# Altium PCB PCB.PcbDoc
Units mm, origin at the board's own origin, x right, y up, seen from the top; angles counter-clockwise.
Board outline 144.78 x 104.14 mm, 2 copper layers (Top Layer, Bottom Layer); 7 components, 21 nets, 18 pads, 0 vias.
Unrouted connection lines stored in the file: 9.
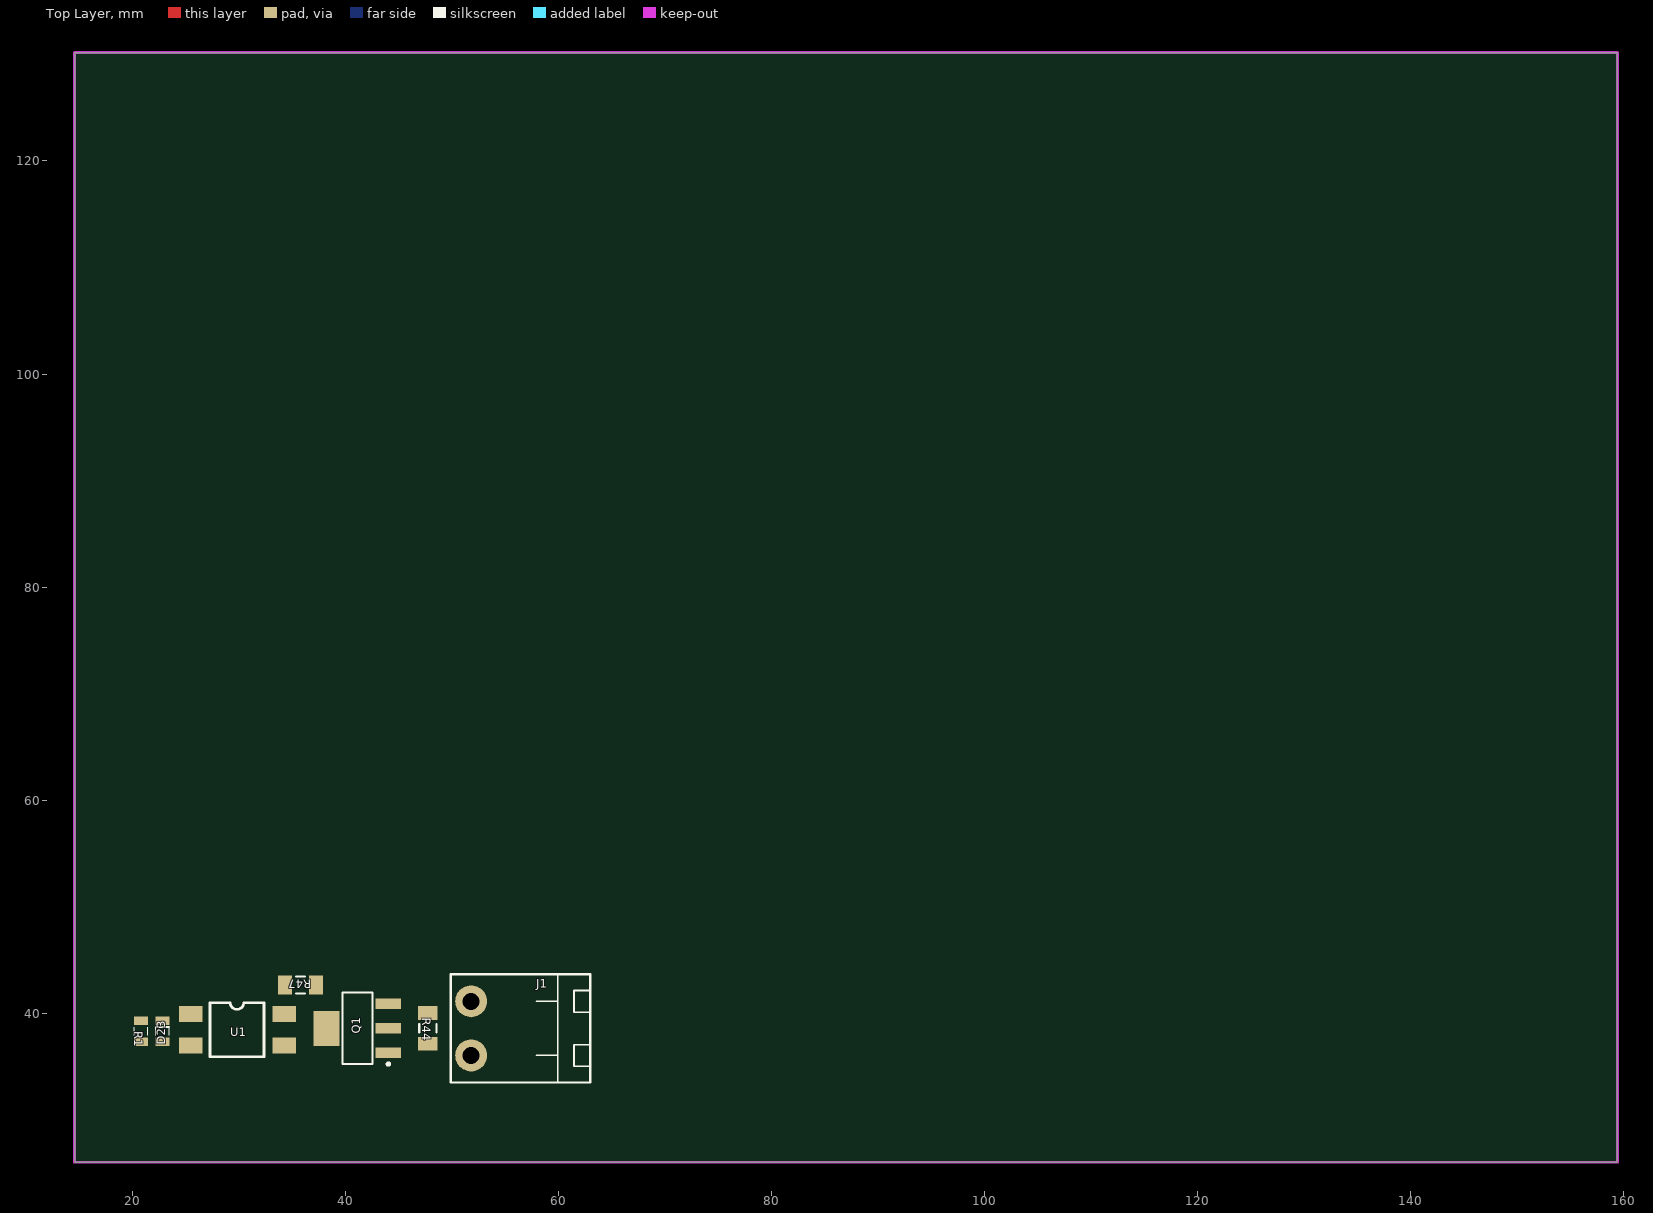
[diagram p0: Top Layer view]
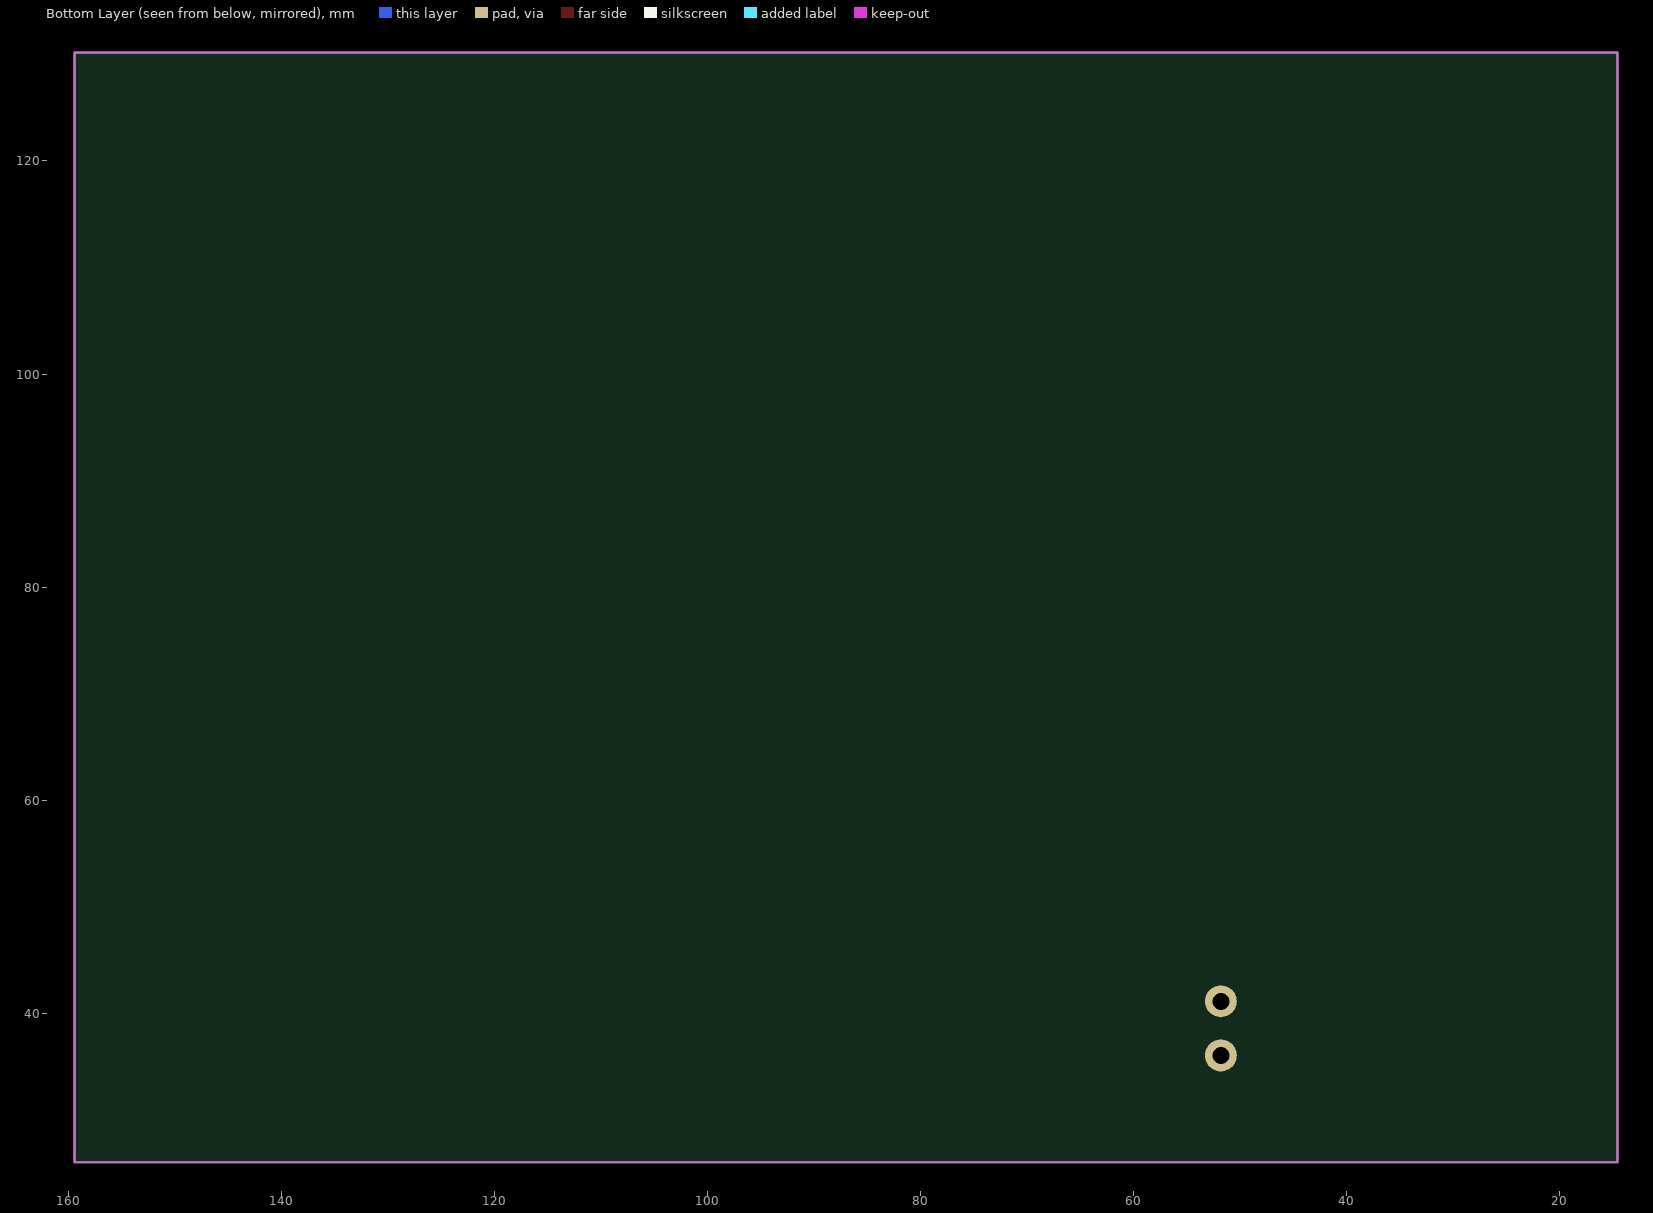
[diagram p1: Bottom Layer view, seen from below]

## Layer stack, top to bottom
Top Solder: solder mask 0.0102, Solder Resist, Dk 3.5
Top Layer: signal copper 0.0356
Dielectric 1: dielectric 0.32, FR-4, Dk 4.8
Bottom Layer: signal copper 0.0356
Bottom Solder: solder mask 0.0102, Solder Resist, Dk 3.5

## Board outline
14.605,26.035 159.385,26.035 159.385,130.175 14.605,130.175

## Design rules (kind name [scope] priority, off if disabled: settings)
Clearance [All] p1: gap=0.3
ComponentClearance [All] p1 off: gap=0 collisioncheckmode=3 verticalgap=0 showdistances=FALSE
Height [All] p1: minheight=0 maxheight=50 prefheight=12.7
PolygonConnect [All] p1: connectstyle=Relief reliefconductorwidth=0.254 reliefentries=4 polygonreliefangle="90 Angle" airgapwidth=0.254
RoutingVias [All] p1: holewidth=0.711 width=1.27 viastyle="Through Hole" minholewidth=0.711 minwidth=1.27 maxholewidth=0.711 maxwidth=1.27
SolderMaskExpansion [All] p1: expansion=0.102
Width [All] p1: maxlimit=0.5 minlimit=0.5 preferedwidth=0.5
28 further rules are at their usual default settings.

## Components (designator, comment, footprint, x,y, rotation, side; value= is the part's Value field where it differs from the comment)
D23 "YELLOW" 0805_Diode 22.86,38.354 r90 top
J1 "2Pin" Fonics_2PIN_1 51.816,38.608 r90 top
Q1 "BCP56" SOT223-4N 41.148,38.608 r180 top
R1 "330" 0805 20.828,38.354 r270 top
R44 "470" RESC3216N 47.752,38.608 r270 top
R47 "47" RESC3216N 35.814,42.672 r180 top
U1 "TLP521" SMD_4PIN 29.845,38.481 r0 top

## Footprints (in the part's own frame and the unit in brackets; to place one, negate y for a bottom-side part, rotate by r counter-clockwise, add the part's x,y. Pads: shape width x height; smd on the part's side, far side on the other; paste and mask are expansions set on the pad)
0805 [mm] "Chip Resistor, Body 2.0x1.3mm, IPC Medium Density"
  rect 0.8x1.3 smd: 1(-0.991,0) 2(0.991,0)
  silkscreen extent -0.38,-0.64 0.38,0.64, body extent -1.07,-0.7 1.07,0.7, height 0.65
0805_Diode [mm] "Chip Resistor, Body 2.0x1.3mm, IPC Medium Density"
  rect 0.8x1.3 smd: 1(-0.991,0) 2(0.991,0)
  silkscreen extent -0.38,-0.64 0.38,0.64, body extent -1.07,-0.7 1.07,0.7, height 0.65
Fonics_2PIN_1 [mm]
  round 3 hole 1.6: 1(-2.54,0) 2(2.54,0)
  silkscreen extent -5.08,-11.18 5.08,1.91
RESC3216N [mm] "Chip Resistor, Body 3.2x1.6mm, IPC Medium Density"
  rect 1.3x1.8 smd: 1(-1.45,0) 2(1.45,0)
  silkscreen extent -0.4,-0.8 0.4,0.8, body extent -1.68,-0.87 1.68,0.87, height 0.71
SMD_4PIN [mm] "SOP, 8-Leads, Body 6x4.7mm, Pitch 1.27mm, IPC Medium Density"
  rect 2.2x1.5 smd: 1(-4.318,1.473) 2(-4.343,-1.473) 3(4.445,-1.473) 4(4.445,1.473)
  silkscreen extent -2.54,-2.54 2.54,2.54
SOT223-4N [mm] "SOT223, 4-Leads, Body 6.5x3.5mm, Pitch 2.3mm, Lead Span 7mm, IPC Medium Density"
  rect 2.4x1 smd: 1(-2.9,2.3) 2(-2.9,0) 3(-2.9,-2.3)
  rect 2.4x3.3 smd: 4(2.9,0)
  silkscreen extent -3.03,-3.35 1.4,3.47, body extent -1.85,-3.35 1.85,3.35, height 1.8

## Part data
D23: library part LED, "Typical INFRARED GaAs LED"
J1: library part "Header 2", "Header, 2-Pin"
Q1: "Silicon Bipolar Transistor"
R1 R44 R47: library part Res1, "Resistor"
U1: library part Optoisolator

## Nets (pads, with @x,y where several pads share a name; then routed paths per layer and width w, separated by ;. In a path a pad name is that pad's centre, name@x,y a point inside that pad or via, vN(x,y) a via of type N, cw(c..) or ccw(c..) an arc to the next point about the centre after c; other vN are vias at no path point)
GND: U1.2
GND2: J1.1 R44.2
NetD23_1: D23.1 R1.2
NetD23_2: D23.2 U1.1
NetD24_1: 
NetD24_2: 
NetD25_1: 
NetD25_2: 
NetJ1_2: J1.2 Q1.3 R44.1
NetJ4_2: 
NetJ6_2: 
NetQ1_1: Q1.1 U1.3
NetQ1_2: Q1.2 Q1.4 R47.2 U1.4
NetQ13_1: 
NetQ13_2: 
NetQ14_1: 
NetQ14_2: 
NetR1_1: R1.1
NetR2_1: 
NetR25_1: 
VDD2: R47.1

## Keep-outs
Keep-Out Layer:
  the board outline again, w0.254